# Altium PCB smarchWatch_V5_Charger.PcbDoc
Units mm, origin at the board's own origin, x right, y up, seen from the top; angles counter-clockwise.
Board outline 17.05 x 10.45 mm, 2 copper layers (Top Layer, Bottom Layer), stack 1.58 mm thick; 3 components, 2 nets, 15 pads, 0 vias.
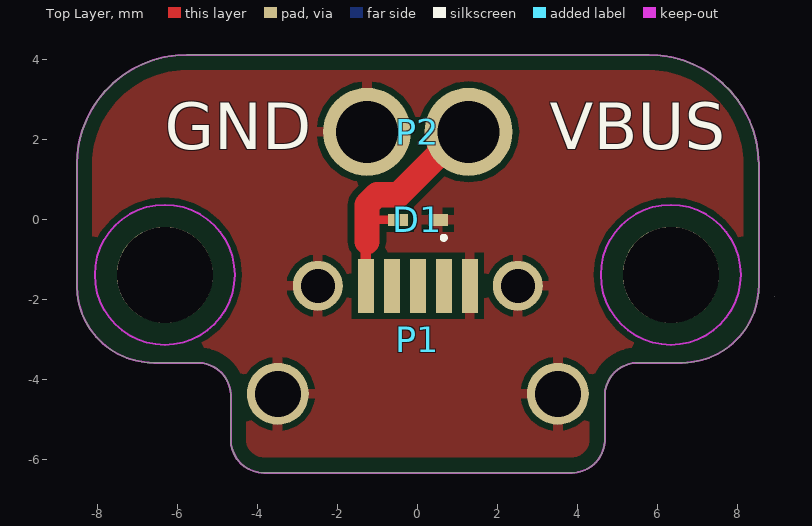
[diagram p0: Top Layer view]
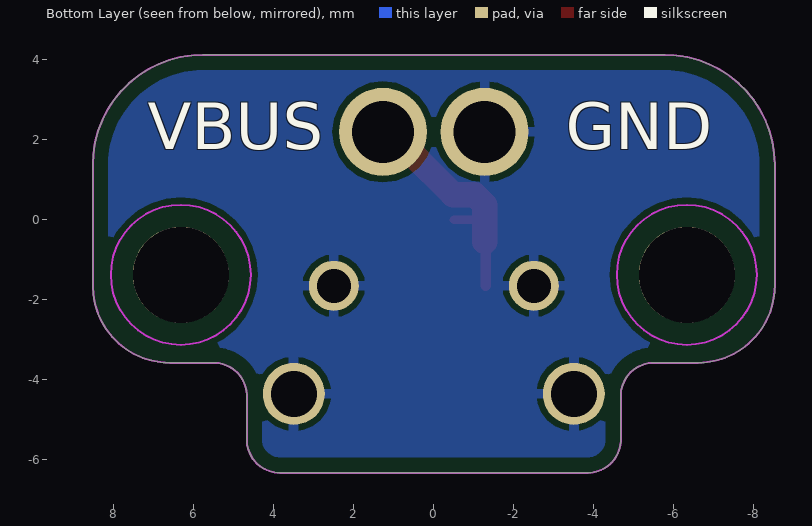
[diagram p1: Bottom Layer view, seen from below]
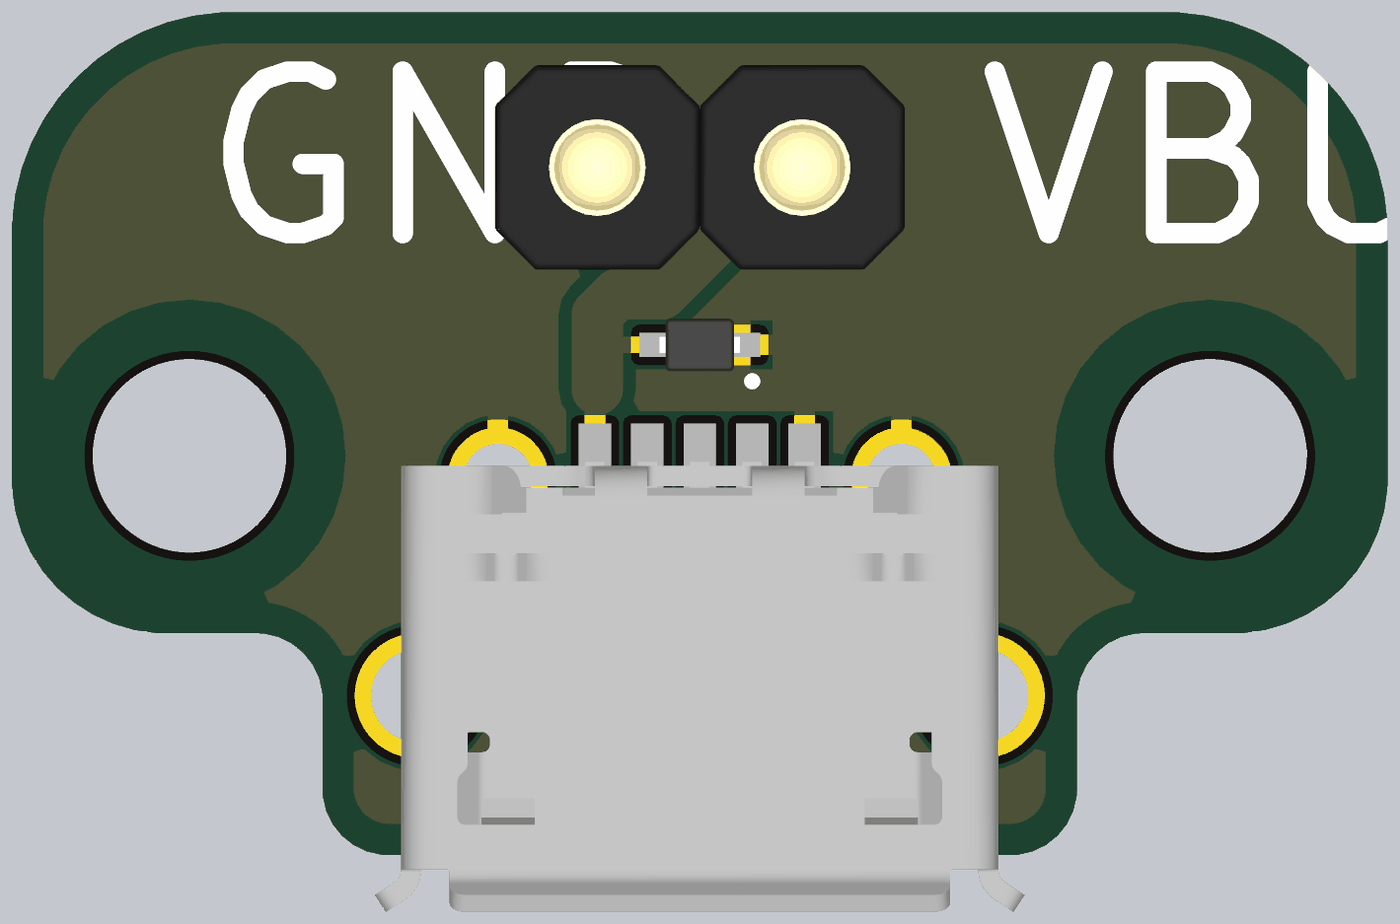
[diagram p2: 3D render of the assembled board from above, using the file's embedded part models]

## Layer stack, top to bottom
Top Solder: solder mask 0.01, Solder Resist, Dk 3.5
Top Layer: signal copper 0.035
Dielectric 1: core 0.175, FR-4, Dk 4.29
Dielectric 3: prepreg 1.16, Dk 3.96
Dielectric 2: core 0.175, Dk 4.29
Bottom Layer: signal copper 0.035
Bottom Solder: solder mask 0.01, Solder Resist, Dk 3.5

## Board outline
-4.675,-5.5 -4.675,-4.4 ccw(c-5.5,-4.4) -5.5,-3.575 -6.6,-3.575 cw(c-6.6,-1.65) -8.525,-1.65 -8.525,1.375 cw(c-5.775,1.375) -5.775,4.125 5.775,4.125 cw(c5.775,1.375) 8.525,1.375 8.525,-1.65 cw(c6.6,-1.65) 6.6,-3.575 5.5,-3.575 ccw(c5.5,-4.4) 4.675,-4.4 4.675,-5.5 cw(c3.85,-5.5) 3.85,-6.325 -3.85,-6.325 cw(c-3.85,-5.5)

## Design rules (kind name [scope] priority, off if disabled: settings)
BoardOutlineClearance BoardOutlineClearance_SILK [OnLayer('Bottom Overlay') or OnLayer('Top Overlay')] p1: gap=0 ignorepadtopadclearanceinfootprint=FALSE
BoardOutlineClearance BoardOutlineClearance_Castellated [(InComponent('CH_GND') OR InComponent('CH_VIN') OR InNet('5V')) OR InComponent('TX') OR InComponent('RX') OR (IsTrack AND InNet('TX')) OR (IsTrack AND InNet('RX')) OR InComponent('VBAT') OR InComponent('GND') OR (IsTrack AND InNet('VBAT')) OR InComponent('ANT1') OR (IsTrack AND InNet('ANT'))] p2: gap=0 ignorepadtopadclearanceinfootprint=FALSE
BoardOutlineClearance BoardOutlineClearance_TOUCH [InNamedPolygon('TOUCH_6') or  InNamedPolygon('TOUCH_7') or  InNamedPolygon('TOUCH_8') or  InNamedPolygon('TOUCH_8') or  InNamedPolygon('TOUCH_SOLDER_6') or  InNamedPolygon('TOUCH_SOLDER_7') or  InNamedPolygon('TOUCH_SOLDER_8') or  InNamedPolygon('TOUCH_SOLDER_8') or InComponent('CT_1') or  InComponent('CT_2') or   InComponent('CT_3') or   InComponent('CT_4')] p3: gap=0 ignorepadtopadclearanceinfootprint=FALSE
BoardOutlineClearance [All] p4: gap=0.381 ignorepadtopadclearanceinfootprint=FALSE
Clearance Clearance_Castellated [(InComponent('CH_GND') OR InComponent('CH_VIN') OR InNet('5V')) OR InComponent('TX') OR InComponent('RX') OR (IsTrack AND InNet('TX')) OR (IsTrack AND InNet('RX')) OR InComponent('VBAT') OR InComponent('GND') OR (IsTrack AND InNet('VBAT')) OR InComponent('ANT1') OR (IsTrack AND InNet('ANT')) vs IsKeepOut] p1: gap=0 ignorepadtopadclearanceinfootprint=FALSE
Clearance Clearance_ANT [InComponent('ANT1')] p2: gap=2 ignorepadtopadclearanceinfootprint=FALSE
Clearance [All] p3: gap=0.152 ignorepadtopadclearanceinfootprint=FALSE
ComponentClearance [All] p1: gap=0 collisioncheckmode=3 verticalgap=0 showdistances=FALSE
MinimumSolderMaskSliver [All] p1: minsoldermaskwidth=0
PolygonConnect PolygonConnect_CHARGE [InComponent('CH_GND') OR InComponent('CH_VIN') OR InComponent('GND')] p1: connectstyle=Direct reliefconductorwidth=0.254 reliefentries=4 polygonreliefangle="90 Angle" airgapwidth=0.254
PolygonConnect PolygonConnect_TOUCH [InNet('TOUCH_6') or InNet('TOUCH_7') or  InNet('TOUCH_8') or  InNet('TOUCH_9')] p2: connectstyle=Direct reliefconductorwidth=0.254 reliefentries=4 polygonreliefangle="90 Angle" airgapwidth=0.254
PolygonConnect PolygonConnect_VIA [IsVia] p3: connectstyle=Direct reliefconductorwidth=0.254 reliefentries=4 polygonreliefangle="90 Angle" airgapwidth=0.254
PolygonConnect [All] p4: connectstyle=Relief reliefconductorwidth=0.254 reliefentries=4 polygonreliefangle="90 Angle" airgapwidth=0.152
RoutingVias [All] p1: holewidth=0.711 width=1.27 viastyle="Through Hole" minholewidth=0.203 minwidth=0.508 maxholewidth=127 maxwidth=127
SilkToSilkClearance [All] p1: silktosilkclearance=0
SilkToSolderMaskClearance [IsPad] p1: minsilkscreentomaskgap=0 clearancetoexposedcopper=TRUE
SolderMaskExpansion [All] p1: expansion=0.102
Width [All] p1: maxlimit=25.4 minlimit=0.102 preferedwidth=0.203
26 further rules are at their usual default settings.

## Components (designator, comment, footprint, x,y, rotation, side; value= is the part's Value field where it differs from the comment)
D1 "ESD9B5.0ST5G" ESD9B5.0ST5G 0,0 r180 top
P1 "10118194-0001LF" 10118194-0001LF 0,-1.65 r0 top
P2 "825-22-002-10-001101" 825-22-002-10-001101 0,2.2 r180 top

## Footprints (in the part's own frame and the unit in brackets; to place one, negate y for a bottom-side part, rotate by r counter-clockwise, add the part's x,y. Pads: shape width x height; smd on the part's side, far side on the other; paste and mask are expansions set on the pad)
825-22-002-10-001101 [mm] "2 Position Spring Piston Connector Through Hole"
  round 2.2 hole 1.55: 1(-1.27,0) 2(1.27,0)
  body extent -2.54,-1.27 2.54,1.27, height 6.96
10118194-0001LF [mm] "10118194-0001LF USB - micro B USB 2.0 Receptacle Connector 5 Position Surface Mount, Right Angle; Through Hole"
  rect 0.4x1.35 smd: 1(-1.3,0) 2(-0.65,0) 3(0,0) 4(0.65,0) 5(1.3,0)
  round 1.55 hole 1.15: 5(-3.5,-2.7) 5(3.5,-2.7)
  round 1.25 hole 0.85: 5(-2.5,0) 5(2.5,0)
  body extent -4.02,-5.38 4.02,0.2, height 2.74
ESD9B5.0ST5G [mm] "TVS DIODE 5V SOD923"
  rect 0.5x0.3 smd: 1(-0.5,0) 2(0.5,0)
  silkscreen extent -0.7,0.4 -0.6,0.5, body extent -0.5,-0.32 0.5,0.32, height 0.4

## Part data
D1: "TVS DIODE 5V SOD923"
P1: "10118194-0001LF USB - micro B USB 2.0 Receptacle Connector 5 Position Surface Mount, Right Angle; Through Hole"
P2: "2 Position Spring Piston Connector Through Hole"

## Free pads (board coordinates)
  round 2.4 hole 2.4 unplated: 0(-6.325,-1.375) 0(6.325,-1.375)

## Nets (pads, with @x,y where several pads share a name; then routed paths per layer and width w, separated by ;. In a path a pad name is that pad's centre, name@x,y a point inside that pad or via, vN(x,y) a via of type N, cw(c..) or ccw(c..) an arc to the next point about the centre after c; other vN are vias at no path point)
GND: D1.1 P1.5 P2.2
VBUS: D1.2 P1.1 P2.1 | length 6.4
  Top Layer w0.203: -1.27,0 D1.2
  Top Layer w0.254: P1.1 -1.3,-0.58 -1.27,-0.55
  Top Layer w0.635: -1.27,-0.55 -1.27,0 -1.27,0.38 -1.02,0.63 -0.476,0.63 0.55,1.656 0.55,2.2 P2.1
pads on no net: P1.2 P1.3 P1.4

## Polygon pours and split planes (outlines as drawn)
GND on Bottom Layer "Bottom Layer-GND" (solid, remove dead copper, pour order 4): -8.525,-3.575 -8.525,1.375 cw(c-5.775,1.375) -5.775,4.125 5.775,4.125 cw(c5.775,1.375) 8.525,1.375 8.525,-3.575 cw(c5.775,-3.575) 5.775,-6.325 -5.775,-6.325 cw(c-5.775,-3.575)
GND on Top Layer "Top Layer-GND" (solid, remove dead copper, pour order 3): -8.525,-3.575 -8.525,1.375 cw(c-5.775,1.375) -5.775,4.125 5.775,4.125 cw(c5.775,1.375) 8.525,1.375 8.525,-3.575 cw(c5.775,-3.575) 5.775,-6.325 -5.775,-6.325 cw(c-5.775,-3.575)

## Keep-outs
Keep-Out Layer:
  circle w0.05: c-6.325,-1.375 r1.75
  circle w0.05: c6.325,-1.375 r1.75
  lines w0.05: -8.525,-1.65 ccw(c-6.6,-1.65) -6.6,-3.575 -5.5,-3.575 cw(c-5.5,-4.4) -4.675,-4.4 -4.675,-5.5 ccw(c-3.85,-5.5) -3.85,-6.325 3.85,-6.325 ccw(c3.85,-5.5) 4.675,-5.5 4.675,-4.4 cw(c5.5,-4.4) 5.5,-3.575 6.6,-3.575 ccw(c6.6,-1.65) 8.525,-1.65 8.525,1.375 ccw(c5.775,1.375) 5.775,4.125 -5.775,4.125 ccw(c-5.775,1.375) -8.525,1.375 -8.525,-1.65

## Silkscreen, mask and mechanical layers (free items; w line width, h text height)
Top Overlay:
  lines w0.025: 8.925,-1.925 8.925,-1.925
  text "GND" at -6.325,1.375 h2
  text "VBUS" at 3.3,1.375 h2
Bottom Overlay:
  text "GND" at -3.3,1.375 h2
  text "VBUS" at 7.15,1.375 h2